# EAGLE board Splitter (EAGLE 9.0.1)
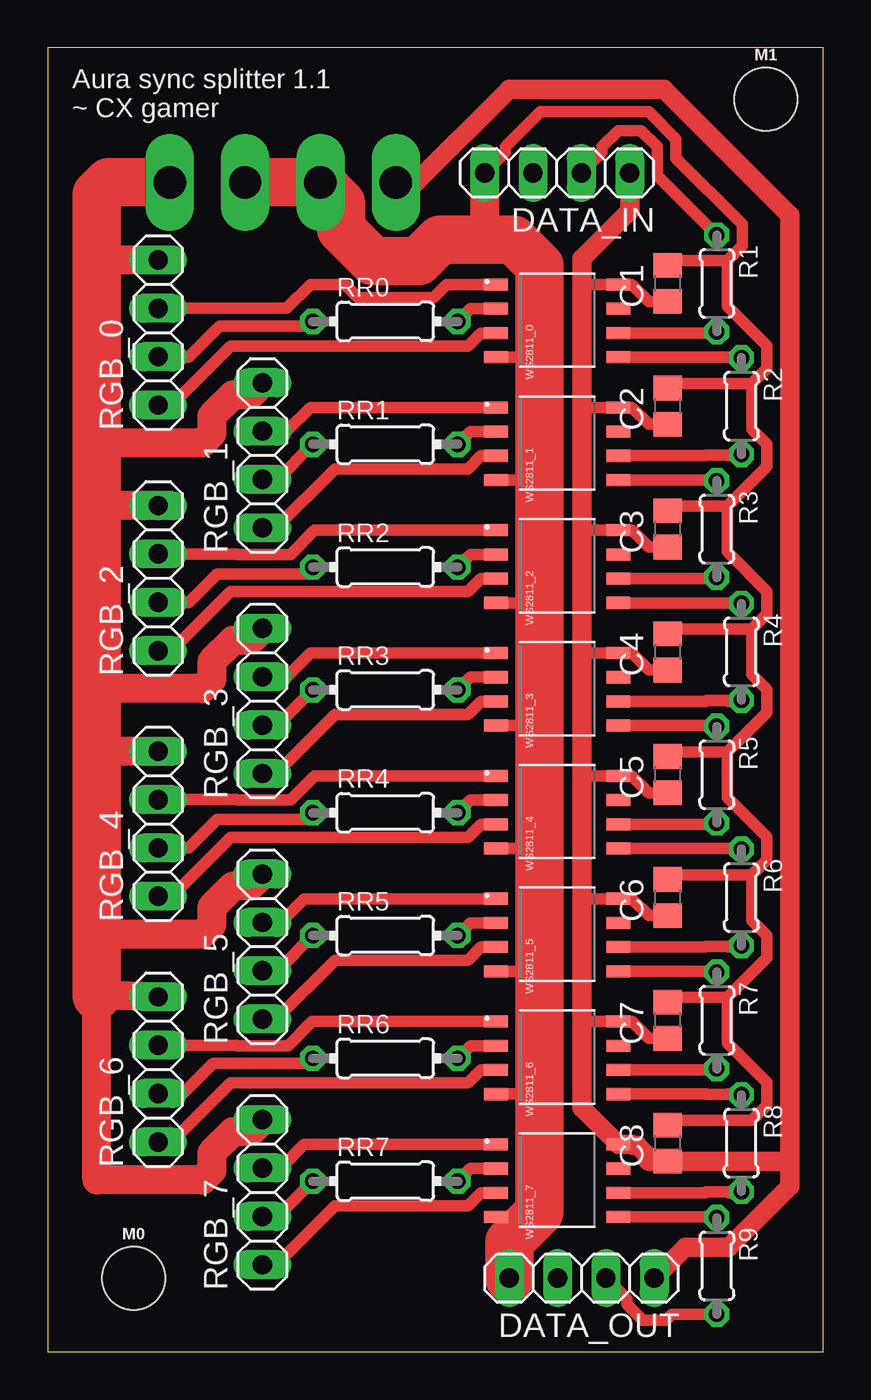
[diagram p0: board, top side]
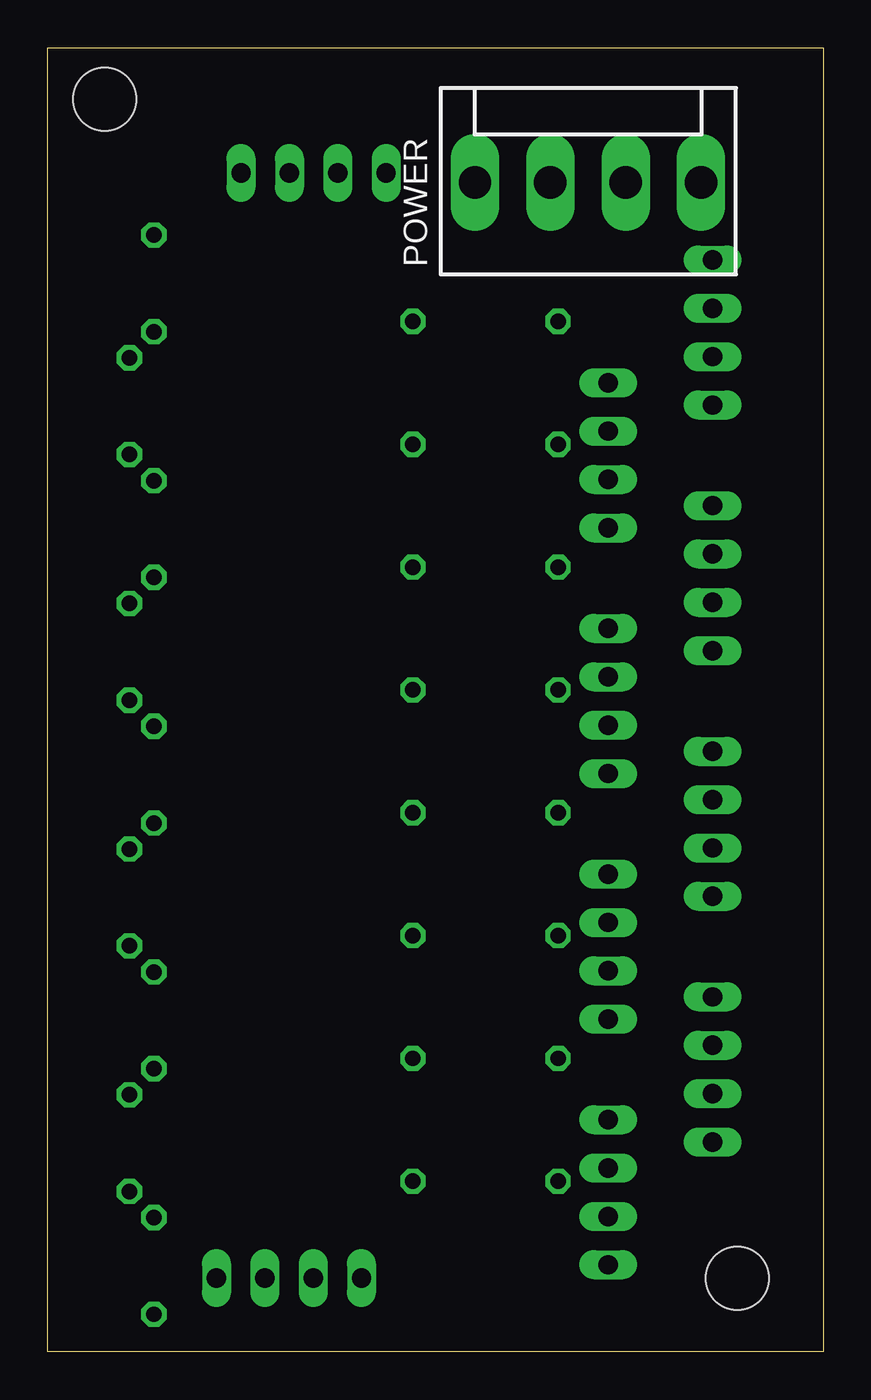
[diagram p1: board, bottom side, seen from below]

Size 40.75 x 68.51 mm. Coordinates in mm from the lower left corner, seen from the top.
Outline: 0,0 40.75,0 40.75,68.51 0,68.51 0,0
Copper layers (1*16): Top 0.035mm / dielectric 1.5mm / Bottom 0.035mm
Design rules "Splitter *": minimum track width 20mil, minimum drill 12mil, track to track 13mil, track to pad 13mil, pad to pad 0.205mm, via to via 0.205mm, smd to smd 5mil, copper to edge 40mil, drill to drill 6mil, minimum pad ring 10mil, minimum via ring 8mil, stop-mask expansion 4mil, vias tented up to drill 0mil, thermal gap 10mil
Net classes: 0 default: width 0.254 mm, clearance 0.127 mm

## Footprints (pad centres in the part's own frame; a part is rotated, then mirrored left to right if it is on the bottom)
C0805 = smd 1.3 x 1.5: 1 -0.95,0; 2 0.95,0
1X04 = drill 1.016 long: 1 -3.81,0; 2 -1.27,0; 3 1.27,0; 4 3.81,0
STAND-OFF = hole 3.302: 0,0
KK-156-4 = drill 1.7 pad 2.184 long: 1 -5.94,0; 2 -1.98,0; 3 1.98,0; 4 5.94,0
0204/5 = drill 0.813 octagon: 1 -2.54,0; 2 2.54,0
0204/7 = drill 0.813 octagon: 1 -3.81,0; 2 3.81,0
WS2811 = smd 1.27 x 0.635: DIN 3.22,-0.67; DO 3.22,-1.94; GND -3.22,-1.94; OUTB -3.22,-0.67; OUTG -3.22,0.6; OUTR -3.22,1.87; SET 3.22,0.6; VDD 3.22,1.87

## Placement (x,y rotation side)
C1  100nF  [C0805]  32.58,56.13 90 top
C2  100nF  [C0805]  32.58,49.68 90 top
C3  100nF  [C0805]  32.58,43.23 90 top
C4  100nF  [C0805]  32.58,36.77 90 top
C5  100nF  [C0805]  32.58,30.32 90 top
C6  100nF  [C0805]  32.58,23.87 90 top
C7  100nF  [C0805]  32.58,17.42 90 top
C8  100nF  [C0805]  32.58,10.97 90 top
DATA_IN  DATA_IN  [1X04]  26.77,61.94 180 top
DATA_OUT  DATA_OUT  [1X04]  28.06,3.87 180 top
M0  [STAND-OFF]  4.52,3.87 0 top
M1  [STAND-OFF]  37.74,65.81 0 top
POWER  POWER  [KK-156-4]  12.36,61.44 0 bottom
R1  33  [0204/5]  35.16,56.13 270 top
R2  33  [0204/5]  36.45,49.68 270 top
R3  33  [0204/5]  35.16,43.23 270 top
R4  33  [0204/5]  36.45,36.77 270 top
R5  33  [0204/5]  35.16,30.32 270 top
R6  33  [0204/5]  36.45,23.87 270 top
R7  33  [0204/5]  35.16,17.42 270 top
R8  33  [0204/5]  36.45,10.97 270 top
R9  33  [0204/5]  35.16,4.52 270 top
RGB_0  RGB_0  [1X04]  5.81,53.55 90 top
RGB_1  RGB_1  [1X04]  11.29,47.1 90 top
RGB_2  RGB_2  [1X04]  5.81,40.65 90 top
RGB_3  RGB_3  [1X04]  11.29,34.19 90 top
RGB_4  RGB_4  [1X04]  5.81,27.74 90 top
RGB_5  RGB_5  [1X04]  11.29,21.29 90 top
RGB_6  RGB_6  [1X04]  5.81,14.84 90 top
RGB_7  RGB_7  [1X04]  11.29,8.39 90 top
RR0  [0204/7]  17.74,54.13 0 top
RR1  [0204/7]  17.74,47.68 0 top
RR2  [0204/7]  17.74,41.23 0 top
RR3  [0204/7]  17.74,34.77 0 top
RR4  [0204/7]  17.74,28.32 0 top
RR5  [0204/7]  17.74,21.87 0 top
RR6  [0204/7]  17.74,15.42 0 top
RR7  [0204/7]  17.74,8.97 0 top
WS2811_0  WS2811_0  [WS2811]  26.77,54.19 0 top
WS2811_1  WS2811_1  [WS2811]  26.77,47.74 0 top
WS2811_2  WS2811_2  [WS2811]  26.77,41.29 0 top
WS2811_3  WS2811_3  [WS2811]  26.77,34.84 0 top
WS2811_4  WS2811_4  [WS2811]  26.77,28.39 0 top
WS2811_5  WS2811_5  [WS2811]  26.77,21.94 0 top
WS2811_6  WS2811_6  [WS2811]  26.77,15.48 0 top
WS2811_7  WS2811_7  [WS2811]  26.77,9.03 0 top

## Library data of the parts
C1-C8 = eagle-ltspice; SPICEMODEL: NONE; SPICEPREFIX: C
DATA_IN DATA_OUT RGB_0 RGB_1-RGB_7 = pinhead
M0 M1 = SparkFun-Hardware
POWER = con-molex; MF: MOLEX; OC_FARNELL: unknown; OC_NEWARK: unknown
R1-R9 = resistor
RR0 RR1-RR7 = eagle-ltspice
WS2811_0 WS2811_1-WS2811_7 = WS2811

## Nets
12V: POWER.4 RGB_0.4 RGB_1.4 RGB_2.4 RGB_3.4 RGB_4.4 RGB_5.4 RGB_6.4 RGB_7.4
+5V: R8.2 WS2811_7.DIN
B0: RGB_0.1 WS2811_0.OUTB
B1: RGB_1.1 WS2811_1.OUTB
B2: RGB_2.1 WS2811_2.OUTB
B3: RGB_3.1 WS2811_3.OUTB
B4: RGB_4.1 WS2811_4.OUTB
B5: RGB_5.1 WS2811_5.OUTB
B6: RGB_6.1 WS2811_6.OUTB
B7: RGB_7.1 WS2811_7.OUTB
DO: DATA_OUT.2 R9.2
G0: RGB_0.3 WS2811_0.OUTR
G1: RGB_1.3 WS2811_1.OUTR
G2: RGB_2.3 WS2811_2.OUTR
G3: RGB_3.3 WS2811_3.OUTR
G4: RGB_4.3 WS2811_4.OUTR
G5: RGB_5.3 WS2811_5.OUTR
G6: RGB_6.3 WS2811_6.OUTR
G7: RGB_7.3 WS2811_7.OUTR
GND: C1.2 C2.2 C3.2 C4.2 C5.2 C6.2 C7.2 C8.2 DATA_IN.4 DATA_OUT.4 POWER.2 POWER.3 WS2811_0.GND WS2811_1.GND WS2811_2.GND WS2811_3.GND WS2811_4.GND WS2811_5.GND WS2811_6.GND WS2811_7.GND
N$3: R9.1 WS2811_7.DO
N$4: R2.1 WS2811_0.DO
N$5: R3.1 WS2811_1.DO
N$6: R2.2 WS2811_1.DIN
N$8: R4.1 WS2811_2.DO
N$9: R6.1 WS2811_4.DO
N$10: R3.2 WS2811_2.DIN
N$12: R7.1 WS2811_5.DO
N$13: R8.1 WS2811_6.DO
N$14: R4.2 WS2811_3.DIN
N$16: R5.1 WS2811_3.DO
N$18: R5.2 WS2811_4.DIN
N$22: R6.2 WS2811_5.DIN
N$23: DATA_IN.2 R1.1
N$26: R7.2 WS2811_6.DIN
R0: RGB_0.2 RR0.1
R1: RGB_1.2 RR1.1
R2: RGB_2.2 RR2.1
R3: RGB_3.2 RR3.1
R4: RGB_4.2 RR4.1
R5: RGB_5.2 RR5.1
R6: RGB_6.2 RR6.1
R7: RGB_7.2 RR7.1
S$4: R1.2 WS2811_0.DIN
S$5: RR0.2 WS2811_0.OUTG
S$6: RR2.2 WS2811_2.OUTG
S$7: RR3.2 WS2811_3.OUTG
S$9: RR1.2 WS2811_1.OUTG
S$10: RR4.2 WS2811_4.OUTG
S$11: RR5.2 WS2811_5.OUTG
S$13: RR6.2 WS2811_6.OUTG
S$14: RR7.2 WS2811_7.OUTG
VCC: C1.1 C2.1 C3.1 C4.1 C5.1 C6.1 C7.1 C8.1 DATA_IN.1 DATA_OUT.1 POWER.1 WS2811_0.VDD WS2811_1.VDD WS2811_2.VDD WS2811_3.VDD WS2811_4.VDD WS2811_5.VDD WS2811_6.VDD WS2811_7.VDD

## Tracks (layer width: path | path; a pad name or v marks a point on that pad's centre or on a via)
12V
  Top 1.524: RGB_2.4 2.64,44.46 2.58,44.52 | 2.58,47.74 8.13,47.74 8.62,48.24 8.62,49.16 9.74,50.27 10.66,50.27 RGB_1.4 | RGB_4.4 2.64,31.55 2.58,31.61 | 2.58,34.84 8.13,34.84 8.62,35.34 8.62,36.25 9.74,37.37 10.66,37.37 RGB_3.4 | 2.58,21.94 8.13,21.94 8.62,22.43 8.62,23.35 9.74,24.47 10.66,24.47 RGB_5.4 | RGB_6.4 4.13,18.71 2.58,18.71 2.58,9.03 8.13,9.03 8.62,9.53 8.62,10.45 9.74,11.56 10.66,11.56 RGB_7.4 | RGB_0.4 2.64,57.36 2.58,57.42
  Top 2.54: 2.58,56.13 2.58,47.74 2.58,44.52 2.58,34.84 2.58,31.61 2.58,21.94 2.58,18.71 | 2.58,57.42 2.58,56.13 | 2.58,56.13 2.58,57.42 | POWER.4 3.22,61.44 2.58,60.8 2.58,57.42
+5V
  Top 0.61: R8.2 36.39,8.36 35.76,8.36 35.72,8.4 34.6,8.4 34.56,8.36 WS2811_7.DIN
B0
  Top 0.61: WS2811_0.OUTB 22.78,53.52 22.09,52.83 9.61,52.83 6.51,49.74 RGB_0.1
B1
  Top 0.61: WS2811_1.OUTB 22.78,47.07 22.09,46.38 15.09,46.38 11.94,43.23 11.35,43.23 RGB_1.1
B2
  Top 0.61: RGB_2.1 6.51,36.84 9.61,39.93 22.09,39.93 22.78,40.62 WS2811_2.OUTB
B3
  Top 0.61: RGB_3.1 12,30.38 15.09,33.48 22.09,33.48 22.78,34.17 WS2811_3.OUTB
B4
  Top 0.61: RGB_4.1 6.51,23.93 9.61,27.03 22.09,27.03 22.78,27.72 WS2811_4.OUTB
B5
  Top 0.61: WS2811_5.OUTB 22.78,21.27 22.09,20.58 15.09,20.58 12,17.48 RGB_5.1
B6
  Top 0.61: RGB_6.1 5.87,10.97 6.45,10.97 9.61,14.12 22.09,14.12 22.78,14.81 WS2811_6.OUTB
B7
  Top 0.61: WS2811_7.OUTB 22.78,8.36 22.09,7.67 15.09,7.67 12,4.58 RGB_7.1
DO
  Top 0.61: DATA_OUT.2 30.43,2.78 30.43,2.51 31.28,1.66 32.47,1.66 32.79,1.98 R9.2
G0
  Top 0.61: WS2811_0.OUTR 20.96,56.06 20.28,55.38 16.32,55.38 15.64,56.06 13.81,56.06 12.56,54.82 RGB_0.3
G1
  Top 0.61: WS2811_1.OUTR 13.81,49.61 12.56,48.37 RGB_1.3
G2
  Top 0.61: WS2811_2.OUTR 21.61,43.16 20.96,43.16 14.03,43.16 12.76,41.89 9.95,41.89 9.92,41.92 RGB_2.3
G3
  Top 0.61: WS2811_3.OUTR 13.81,36.71 12.56,35.46 RGB_3.3
G4
  Top 0.61: RGB_4.3 9.92,29.01 9.95,28.99 12.76,28.99 14.03,30.26 WS2811_4.OUTR
G5
  Top 0.61: RGB_5.3 11.31,22.58 12.26,22.58 13.48,23.81 WS2811_5.OUTR
G6
  Top 0.61: RGB_6.3 9.92,16.11 9.95,16.08 12.63,16.08 13.9,17.35 WS2811_6.OUTR
G7
  Top 0.61: RGB_7.3 11.31,9.68 12.26,9.68 13.48,10.9 WS2811_7.OUTR
GND
  Top 0.61: DATA_IN.4 24.06,63.03 24.06,63.3 25.9,65.14 31.59,65.14 33.02,63.71 33.02,62.71 36.51,59.23 36.51,58.11 35.72,57.32 | C1.2 32.82,57.32 35.72,57.32 | 35.72,57.32 35.72,54.94 37.8,52.86 37.8,51.66 37.01,50.87 | C2.2 32.82,50.87 37.01,50.87 | 37.01,50.87 37.01,48.48 37.8,47.69 37.8,46.5 35.72,44.42 | C3.2 32.82,44.42 35.72,44.42 | 35.72,44.42 35.72,42.03 37.8,39.95 37.8,38.76 37.01,37.97 | C4.2 32.82,37.97 37.01,37.97 | 37.01,37.97 37.01,35.58 37.8,34.79 37.8,33.6 35.72,31.52 | C5.2 32.82,31.52 35.72,31.52 | 35.72,31.52 35.72,29.13 37.8,27.05 37.8,25.85 37.01,25.06 | C6.2 32.82,25.06 37.01,25.06 | 37.01,25.06 37.01,22.68 37.8,21.89 37.8,20.69 35.72,18.61 | C7.2 32.82,18.61 35.72,18.61 | 35.72,18.61 35.72,16.23 37.8,14.15 37.8,12.95 37.01,12.16 32.82,12.16 C8.2 | WS2811_0.GND 25.84,52.25 25.84,52.26 | WS2811_1.GND 25.84,45.8 25.84,45.81 | WS2811_2.GND 25.84,39.35 | WS2811_3.GND 25.84,32.9 | WS2811_4.GND 25.84,26.45 | WS2811_5.GND 25.84,20 | WS2811_6.GND 25.84,13.54 25.84,13.55 | WS2811_7.GND 25.57,7.09 25.84,7.36 | 25.84,7.36
  Top 1.524: DATA_IN.4 22.96,58.42
  Top 2.54: POWER.3 POWER.2 15.42,60.35 15.42,58.97 17.11,57.29 19.49,57.29 20.62,58.42 22.96,58.42 24.48,58.42 25.84,57.06 25.84,52.26 25.84,45.81 25.84,39.35 25.84,32.9 25.84,26.45 25.84,20 25.84,13.55 25.84,7.36 24.25,5.78 DATA_OUT.4
N$3
  Top 0.61: WS2811_7.DO 35.13,7.09 R9.1
N$4
  Top 0.61: R2.1 36.42,52.25 35.73,52.25 35.72,52.24 34.6,52.24 34.59,52.25 WS2811_0.DO
N$5
  Top 0.61: WS2811_1.DO 35.13,45.8 R3.1
N$6
  Top 0.61: R2.2 36.39,47.07 35.76,47.07 35.72,47.11 34.6,47.11 34.56,47.07 WS2811_1.DIN
N$8
  Top 0.61: R4.1 36.42,39.35 35.73,39.35 35.72,39.34 34.6,39.34 34.59,39.35 WS2811_2.DO
N$9
  Top 0.61: R6.1 36.42,26.45 35.73,26.45 35.72,26.44 34.6,26.44 34.59,26.45 WS2811_4.DO
N$10
  Top 0.61: WS2811_2.DIN 35.1,40.62 R3.2
N$12
  Top 0.61: WS2811_5.DO 35.13,20 R7.1
N$13
  Top 0.61: R8.1 36.42,13.54 35.73,13.54 35.72,13.53 34.6,13.53 34.59,13.54 WS2811_6.DO
N$14
  Top 0.61: R4.2 36.39,34.17 35.76,34.17 35.72,34.21 34.6,34.21 34.56,34.17 WS2811_3.DIN
N$16
  Top 0.61: WS2811_3.DO 35.13,32.9 R5.1
N$18
  Top 0.61: WS2811_4.DIN 35.1,27.72 R5.2
N$22
  Top 0.61: R6.2 36.39,21.27 35.76,21.27 35.72,21.31 34.6,21.31 34.56,21.27 WS2811_5.DIN
N$23
  Top 0.61: R1.1 32.03,61.8 32.03,63.3 31.18,64.15 29.98,64.15 29.14,63.3 29.14,63.03 DATA_IN.2
N$26
  Top 0.61: WS2811_6.DIN 35.1,14.81 R7.2
R0
  Top 0.61: RGB_0.2 5.83,52.26 7.42,52.26 9.04,53.88 13.68,53.88 RR0.1
R1
  Top 0.61: RR1.1 12.06,45.81 11.31,45.81 RGB_1.2
R2
  Top 0.61: 6.45,39.35 5.83,39.35 RGB_2.2 7.4,39.38 8.9,40.87 13.58,40.87 RR2.1
R3
  Top 0.61: RGB_3.2 11.31,32.9 12.06,32.9 RR3.1
R4
  Top 0.61: 6.43,26.47 RGB_4.2 7.4,26.47 8.9,27.97 13.58,27.97 RR4.1
R5
  Top 0.61: RGB_5.2 11.31,20 12.06,20 RR5.1
R6
  Top 0.61: RR6.1 13.68,15.17 8.71,15.17 8.71,15.16 7.1,13.55 7.08,13.57 RGB_6.2
R7
  Top 0.61: 11.31,7.1 RGB_7.2 11.31,7.1 | 11.31,7.1 12.26,7.1 12.26,7.29 RR7.1
S$4
  Top 0.61: WS2811_0.DIN 35.1,53.52 R1.2
S$5
  Top 0.61: WS2811_0.OUTG 22.22,54.79 RR0.2
S$6
  Top 0.61: RR2.2 22.22,41.89 WS2811_2.OUTG
S$7
  Top 0.61: RR3.2 22.22,35.44 WS2811_3.OUTG
S$9
  Top 0.61: WS2811_1.OUTG 22.22,48.34 RR1.2
S$10
  Top 0.61: RR4.2 22.22,28.99 WS2811_4.OUTG
S$11
  Top 0.61: RR5.2 22.22,22.54 WS2811_5.OUTG
S$13
  Top 0.61: RR6.2 22.22,16.08 WS2811_6.OUTG
S$14
  Top 0.61: RR7.2 22.22,9.63 WS2811_7.OUTG
VCC
  Top 0.61: C1.1 31.6,55.18 30.71,56.06 WS2811_0.VDD 28.13,56.06 28.06,56.13 | C2.1 31.6,48.73 30.71,49.61 WS2811_1.VDD 28.13,49.61 28.06,49.68 | C3.1 31.6,42.28 30.71,43.16 WS2811_2.VDD 28.13,43.16 28.06,43.23 | C4.1 31.6,35.82 30.71,36.71 WS2811_3.VDD 28.13,36.71 28.06,36.77 | C5.1 31.6,29.37 30.71,30.26 WS2811_4.VDD 28.13,30.26 28.06,30.32 | C6.1 31.6,22.92 30.71,23.81 WS2811_5.VDD 28.13,23.81 28.06,23.87 | C7.1 31.6,16.47 30.71,17.35 WS2811_6.VDD 28.13,17.35 28.06,17.42
  Top 1.016: POWER.1 19.37,61.44 24.26,66.33 32.38,66.33 38.99,59.72 38.99,9.68 | 38.99,9.68 38.99,8.7 36.1,5.81 | 38.99,9.68 38.65,10.02 C8.1 31.6,10.02 31.52,10.09 31.52,10.32 31,10.84 30.77,10.84 30.71,10.9 WS2811_7.VDD 28.06,12.83 28.06,17.42 28.06,23.87 28.06,30.32 28.06,36.77 28.06,43.23 28.06,49.68 28.06,56.13 28.06,57.42 30.58,59.94 DATA_IN.1 | 36.1,5.81 | 36.1,5.81 35.8,5.51 33.51,5.51 DATA_OUT.1

## Text on the board
tNames: Aura sync splitter 1.1 / ~ CX gamer